# Altium PCB JacdacRgbLedGeneric 60.PcbDoc
Units mm, origin at the board's own origin, x right, y up, seen from the top; angles counter-clockwise.
Board outline 19 x 30.35 mm, 2 copper layers (Top Layer, Bottom Layer), stack 1.525 mm thick; 30 components, 16 nets, 97 pads, 13 vias.
Unrouted connection lines stored in the file: 10.
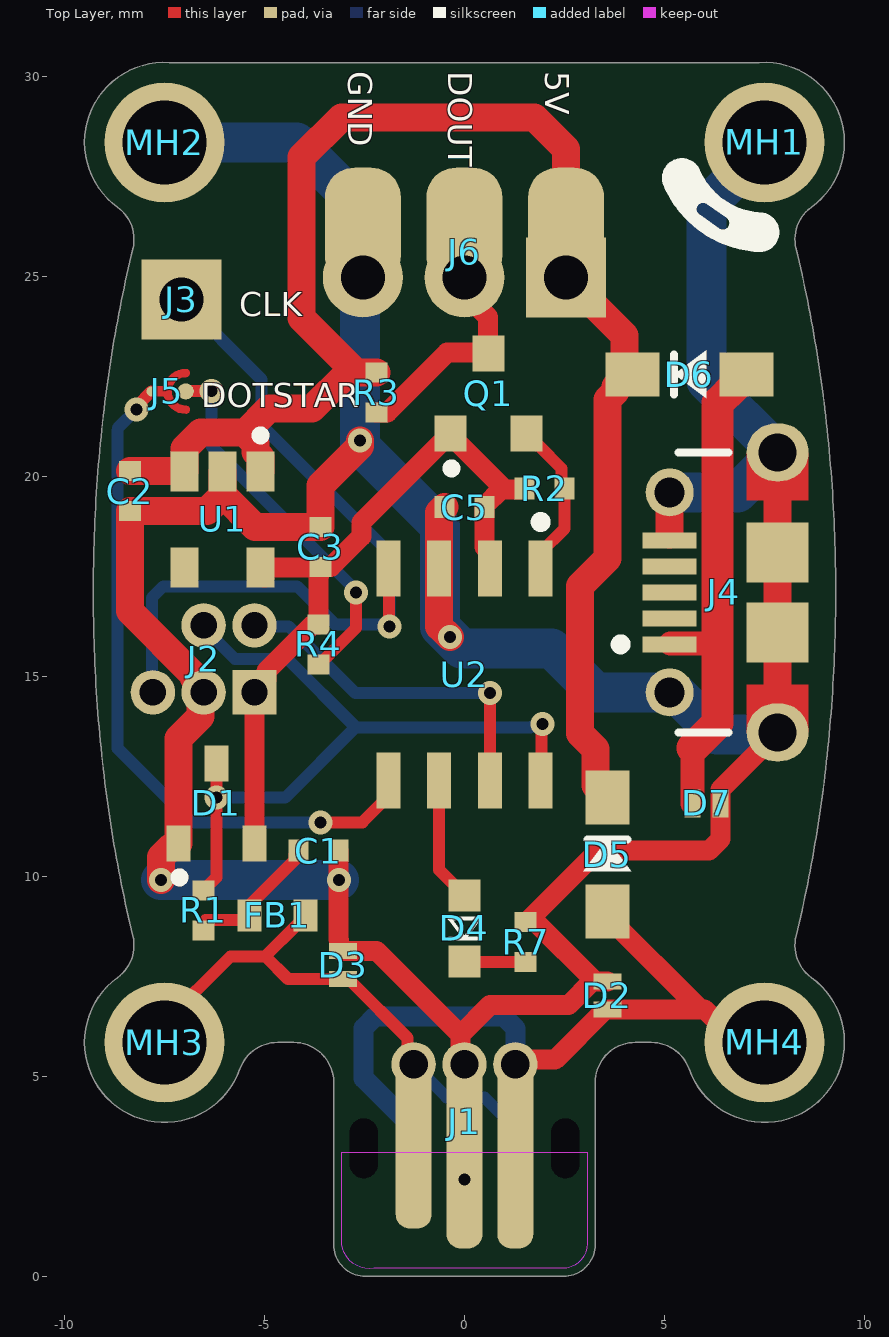
[diagram p0: Top Layer view]
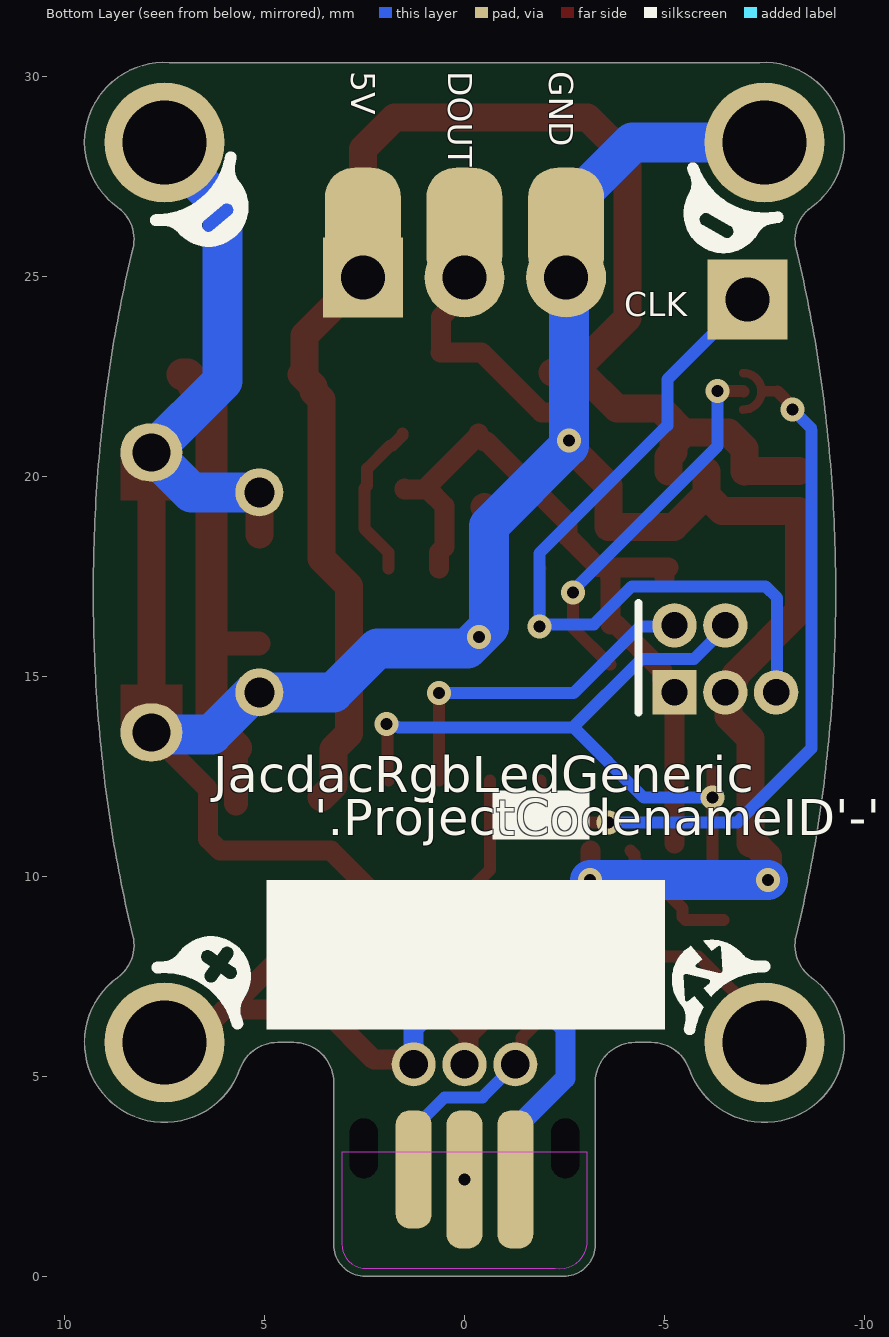
[diagram p1: Bottom Layer view, seen from below]

## Layer stack, top to bottom
Top Solder: solder mask 0.0102, Solder Resist, Dk 3.5
Top Layer: signal copper 0.0356
Dielectric 1: core 1.454, FR-4, Dk 4.2
Bottom Layer: signal copper 0.0356
Bottom Solder: solder mask 0.0102, Solder Resist, Dk 3.5

## Board outline
-9.493,6.017 -9.493,6.018 cw(c-7.5,5.85) -8.675,7.469 ccw(c-9.262,8.278) -8.291,8.516 -8.329,8.675 -8.367,8.835 -8.404,8.996 -8.44,9.158 -8.476,9.32 -8.511,9.483 -8.545,9.646 -8.578,9.811 -8.611,9.976 -8.643,10.141 -8.674,10.307 -8.704,10.474 -8.734,10.641 -8.763,10.809 -8.791,10.978 -8.818,11.147 -8.845,11.316 -8.871,11.486 -8.896,11.656 -8.92,11.827 -8.944,11.999 -8.966,12.17 -8.988,12.343 -9.009,12.515 -9.03,12.688 -9.049,12.862 -9.068,13.036 -9.086,13.21 -9.103,13.384 -9.12,13.559 -9.136,13.734 -9.15,13.91 -9.164,14.085 -9.178,14.261 -9.19,14.438 -9.202,14.614 -9.213,14.791 -9.223,14.968 -9.232,15.145 -9.24,15.322 -9.248,15.499 -9.255,15.677 -9.261,15.854 -9.266,16.032 -9.271,16.21 -9.274,16.388 -9.277,16.566 -9.279,16.744 -9.28,16.922 -9.281,17.1 -9.28,17.278 -9.279,17.456 -9.277,17.634 -9.274,17.812 -9.271,17.99 -9.266,18.168 -9.261,18.346 -9.255,18.523 -9.248,18.701 -9.24,18.878 -9.232,19.055 -9.223,19.232 -9.213,19.409 -9.202,19.586 -9.19,19.762 -9.178,19.938 -9.164,20.114 -9.15,20.29 -9.136,20.466 -9.12,20.641 -9.103,20.816 -9.086,20.99 -9.068,21.164 -9.049,21.338 -9.03,21.511 -9.009,21.685 -8.988,21.857 -8.966,22.029 -8.944,22.201 -8.92,22.373 -8.896,22.544 -8.871,22.714 -8.845,22.884 -8.818,23.053 -8.791,23.222 -8.763,23.391 -8.734,23.559 -8.704,23.726 -8.674,23.893 -8.643,24.059 -8.611,24.224 -8.578,24.389 -8.545,24.553 -8.511,24.717 -8.476,24.88 -8.44,25.042 -8.404,25.204 -8.367,25.365 -8.329,25.525 -8.291,25.684 ccw(c-9.262,25.922) -8.675,26.731 cw(c-7.5,28.35) -7.375,30.346 -7.373,30.346 7.375,30.346 cw(c7.5,28.35) 8.675,26.731 ccw(c9.262,25.922) 8.291,25.684 8.329,25.525 8.367,25.365 8.404,25.204 8.44,25.042 8.476,24.88 8.511,24.717 8.545,24.553 8.578,24.389 8.611,24.224 8.643,24.059 8.674,23.893 8.704,23.726 8.734,23.559 8.763,23.391 8.791,23.222 8.818,23.053 8.845,22.884 8.871,22.714 8.896,22.544 8.92,22.373 8.944,22.201 8.966,22.029 8.988,21.857 9.009,21.685 9.03,21.511 9.049,21.338 9.068,21.164 9.086,20.99 9.103,20.816 9.12,20.641 9.136,20.466 9.15,20.29 9.164,20.114 9.178,19.938 9.19,19.762 9.202,19.586 9.213,19.409 9.223,19.232 9.232,19.055 9.24,18.878 9.248,18.701 9.255,18.523 9.261,18.346 9.266,18.168 9.271,17.99 9.274,17.812 9.277,17.634 9.279,17.456 9.28,17.278 9.281,17.1 9.28,16.922 9.279,16.744 9.277,16.566 9.274,16.388 9.271,16.21 9.266,16.032 9.261,15.854 9.255,15.677 9.248,15.499 9.24,15.322 9.232,15.145 9.223,14.968 9.213,14.791 9.202,14.614 9.19,14.438 9.178,14.261 9.164,14.085 9.15,13.91 9.136,13.734 9.12,13.559 9.103,13.384 9.086,13.21 9.068,13.036 9.049,12.862 9.03,12.688 9.009,12.515 8.988,12.343 8.966,12.17 8.944,11.999 8.92,11.827 8.896,11.656 8.871,11.486 8.845,11.316 8.818,11.147 8.791,10.978 8.763,10.809 8.734,10.641 8.704,10.474 8.674,10.307 8.643,10.141 8.611,9.976 8.578,9.811 8.545,9.646 8.511,9.483 8.476,9.32 8.44,9.158 8.404,8.996 8.367,8.835 8.329,8.675 8.291,8.516 ccw(c9.262,8.278) 8.675,7.469 cw(c7.5,5.85) 9.491,6.036 cw(c7.5,5.85) 5.614,5.183 ccw(c4.672,4.85) 4.672,5.85 4.27,5.85 ccw(c4.27,4.85) 3.27,4.85 3.27,0.799 cw(c2.471,0.799) 2.471,0 2.47,0 -2.47,0 -2.471,0 cw(c-2.471,0.799) -3.27,0.799 -3.27,4.85 ccw(c-4.27,4.85) -4.27,5.85 -4.672,5.85 ccw(c-4.672,4.85) -5.614,5.183 cw(c-7.5,5.85)

## Design rules (kind name [scope] priority, off if disabled: settings)
AssemblyTestPointUsage [All] p1: valid=2
BoardOutlineClearance BoardOutlineSwitchClearance [InComponent('SW1')] p1: gap=0.3 ignorepadtopadclearanceinfootprint=FALSE except(0: Arc-SplitContinuation Track-SplitContinuation SMDPad-SplitContinuation THPad-OutlineEdge THPad-SplitContinuation Via-SplitContinuation Fill-SplitContinuation Poly-SplitContinuation Region-SplitContinuation Text-SplitContinuation; 0.2: Text-OutlineEdge)
BoardOutlineClearance [All] p2: gap=0.3 ignorepadtopadclearanceinfootprint=FALSE except(0: Arc-SplitContinuation Track-CutoutEdge Track-SplitContinuation SMDPad-SplitContinuation THPad-SplitContinuation Via-SplitContinuation Fill-SplitContinuation Poly-SplitContinuation Region-OutlineEdge Region-SplitContinuation Text-OutlineEdge Text-SplitContinuation; 0.2: SMDPad-CutoutEdge; 0.25: Arc-OutlineEdge Arc-CutoutEdge Track-OutlineEdge SMDPad-OutlineEdge THPad-OutlineEdge Poly-OutlineEdge Region-CutoutEdge)
Clearance [All] p1: gap=0.125 ignorepadtopadclearanceinfootprint=FALSE except(0: Arc-Hole Track-Hole SMDPad-Hole THPad-Hole Via-Hole Fill-Hole Poly-Hole Region-Hole Text-Hole)
ComponentClearance MH5.0KeepoutaAreaClearance [InComponent('MH1') or InComponent('MH2')  or InComponent('MH3') or InComponent('MH4') vs InComponent('D6') or InComponent('D7') or InComponent('D8') or InComponent('D9') or InComponent('D10') or InComponent('D11') or InComponent('D12') or InComponent('D13') or InComponent('C6') or InComponent('C7') or InComponent('C8')  or  InComponent('C9') or  InComponent('C12') or InComponent('J3')] p1: gap=0 collisioncheckmode=3 verticalgap=0 showdistances=FALSE
ComponentClearance [All] p2: gap=0.2 collisioncheckmode=3 verticalgap=0.2 showdistances=FALSE
DiffPairsRouting [All] p1: maxlimit=2 minlimit=0.15 mostfreqgap=0.15 toplayer_minwidth=0.15 toplayer_maxwidth=2 toplayer_prefwidth=0.15 bottomlayer_minwidth=0.15 bottomlayer_maxwidth=2 bottomlayer_prefwidth=0.15 substack1={CB9D278B-8BF5-444A-AAF4-837A2A9DF42D} toplayer_{cb9d278b-8bf5-444a-aaf4-837a2a9df42d}_minwidth=0.381 toplayer_{cb9d278b-8bf5-444a-aaf4-837a2a9df42d}_maxwidth=0.381 toplayer_{cb9d278b-8bf5-444a-aaf4-837a2a9df42d}_prefwidth=0.381 bottomlayer_{cb9d278b-8bf5-444a-aaf4-837a2a9df42d}_minwidth=0.381 bottomlayer_{cb9d278b-8bf5-444a-aaf4-837a2a9df42d}_maxwidth=0.381 bottomlayer_{cb9d278b-8bf5-444a-aaf4-837a2a9df42d}_prefwidth=0.381 substack2={826B8647-A721-4255-895A-19F9591B9CD1} toplayer_{826b8647-a721-4255-895a-19f9591b9cd1}_minwidth=0.381 toplayer_{826b8647-a721-4255-895a-19f9591b9cd1}_maxwidth=0.381 toplayer_{826b8647-a721-4255-895a-19f9591b9cd1}_prefwidth=0.381 bottomlayer_{826b8647-a721-4255-895a-19f9591b9cd1}_minwidth=0.381 bottomlayer_{826b8647-a721-4255-895a-19f9591b9cd1}_maxwidth=0.381 bottomlayer_{826b8647-a721-4255-895a-19f9591b9cd1}_prefwidth=0.381 substack3={E64FCAF4-1BC8-437D-B1E0-0E5F2DC0F59E} toplayer_{e64fcaf4-1bc8-437d-b1e0-0e5f2dc0f59e}_minwidth=0.381 toplayer_{e64fcaf4-1bc8-437d-b1e0-0e5f2dc0f59e}_maxwidth=0.381 toplayer_{e64fcaf4-1bc8-437d-b1e0-0e5f2dc0f59e}_prefwidth=0.381 bottomlayer_{e64fcaf4-1bc8-437d-b1e0-0e5f2dc0f59e}_minwidth=0.381 bottomlayer_{e64fcaf4-1bc8-437d-b1e0-0e5f2dc0f59e}_maxwidth=0.381 bottomlayer_{e64fcaf4-1bc8-437d-b1e0-0e5f2dc0f59e}_prefwidth=0.381 substack4={E61CE66C-507C-4E1E-8E83-C905434AFC1C} toplayer_{e61ce66c-507c-4e1e-8e83-c905434afc1c}_minwidth=0.381 toplayer_{e61ce66c-507c-4e1e-8e83-c905434afc1c}_maxwidth=0.381 toplayer_{e61ce66c-507c-4e1e-8e83-c905434afc1c}_prefwidth=0.381 bottomlayer_{e61ce66c-507c-4e1e-8e83-c905434afc1c}_minwidth=0.381 bottomlayer_{e61ce66c-507c-4e1e-8e83-c905434afc1c}_maxwidth=0.381 bottomlayer_{e61ce66c-507c-4e1e-8e83-c905434afc1c}_prefwidth=0.381 maxuncoupledlength=25
FabricationTestPointUsage [All] p1: valid=2 allowmultiple=FALSE
HoleSize [All] p1: absolutevalues=TRUE maxlimit=2.54 minlimit=0.2 maxpercent=80.000 minpercent=20.000
MinimumSolderMaskSliver [All] p1: minsoldermaskwidth=0.005
PlaneClearance [All] p1: clearance=0.3
PlaneConnect [All] p1: planeconnectstyle=Relief reliefexpansion=0.5 reliefentries=4 reliefconductorwidth=0.2 reliefairgap=0.3
PolygonConnect "PolygonConnect GND" [isVIA] p1: connectstyle=Relief reliefconductorwidth=0.2 reliefentries=4 polygonreliefangle="90 Angle" airgapwidth=0.2
PolygonConnect [All] p2: connectstyle=Relief reliefconductorwidth=0.2 reliefentries=4 polygonreliefangle="90 Angle" airgapwidth=0.2
RoutingVias [All] p1: holewidth=0.3 width=0.6 viastyle="Through Hole" minholewidth=0.3 minwidth=0.6 maxholewidth=0.3 maxwidth=0.8
SilkToSilkClearance [All] p1: silktosilkclearance=0.001
SilkToSolderMaskClearance [IsPad] p1: minsilkscreentomaskgap=0.05 clearancetoexposedcopper=TRUE
SolderMaskExpansion [All] p1: expansion=0.075 istentingtop=FALSE
Width [All] p1: maxlimit=2 minlimit=0.15 preferedwidth=0.15 substack1={CB9D278B-8BF5-444A-AAF4-837A2A9DF42D} substack2={826B8647-A721-4255-895A-19F9591B9CD1} substack3={E64FCAF4-1BC8-437D-B1E0-0E5F2DC0F59E} substack4={E61CE66C-507C-4E1E-8E83-C905434AFC1C} minimp=50.000000 maximp=50.000000 favimp=50.000000
20 further rules are at their usual default settings.

## Components (designator, comment, footprint, x,y, rotation, side; value= is the part's Value field where it differs from the comment)
C1 "CL05C330JB51PNC" "C0402_0.55MM - WITHOUT OUTLINE" -3.65,10.641 r180 top
C2 "CL05A105KP5NNNC" "C0402_0.55MM - WITHOUT OUTLINE" -8.368,19.634 r90 top
C3 "CL05A105KP5NNNC" "C0402_0.55MM - WITHOUT OUTLINE" -3.6,18.235 r270 top
C5 "CL05A105KP5NNNC" "C0402_0.55MM - WITHOUT OUTLINE" 0,19.232 r0 top
D1 "BAT54S" "NXP-BAT54S-TO-236AB - WITHOUT OUTLINE" -6.2,11.825 r90 top
D2 "RCLAMP0521P-N" "TVS 0402 - L" 3.575,7.025 r90 top
D3 "RCLAMP0521P-N" "TVS 0402 - L" -3.031,7.785 r90 top
D4 "SML-D12D" "Rohm SML-D12 Orange - without outline" 0,8.7 r90 top
D5 "MBR120VLSFT3G" MBR120VLSFT3G 3.575,10.541 r270 top
D6 "MBR120VLSFT3G" MBR120VLSFT3G 5.625,22.55 r0 top
D7 "RCLAMP0521P-N" "TVS 0402 - L" 6.057,11.827 r0 top
FB1 "TDK MPZ1608S102ATA00" "TDK MPZ1608 0.8mm - without outline" -4.675,9.025 r180 top
J1 "3 pin JACDAC edge connector" JACDAC_EDGE_CONNECTOR_NO_TRACES 0,5.85 r180 top
J2 "Hack Connect Mini 1.27 mm pitch 2-row" HACK_CONNECT_MINI_5_X_1_27 -5.25,14.6 r90 top
J3 "0.1\"" "Generic 1x1 2.54mm header -with SMD pads" -7.075,24.425 r0 top
J4 "Amphenol FCI 10118194-0001LF" "FCI-10118194-0001LF-5_V no slots" 6.48,17.1 r90 top
J5 "OpenSolderBlob" SolderBlobA -7.35,22.125 r0 top
J6 "0.1\"" "GENERIC 1X3 2.54MM HEADER -WITH SMD PADS" 0,24.975 r0 top
MH1 "MH_5.0MMK_3.0MMC_2.1MMD_PTH" MH_5.0MMK_3.0MMC_2.1MMD_PTH 7.5,28.35 r0 top
MH2 "MH_5.0MMK_3.0MMC_2.1MMD_PTH" MH_5.0MMK_3.0MMC_2.1MMD_PTH -7.5,28.35 r135 top
MH3 "MH_5.0MMK_3.0MMC_2.1MMD_PTH" MH_5.0MMK_3.0MMC_2.1MMD_PTH -7.5,5.85 r180 top
MH4 "MH_5.0MMK_3.0MMC_2.1MMD_PTH" MH_5.0MMK_3.0MMC_2.1MMD_PTH 7.5,5.85 r270 top
Q1 "2N7002K" SOT-23 0.6,22.075 r90 top
R1 "RC0402FR-07220RL" "R0402 - Without outline" -6.525,9.15 r270 top
R2 "10k" "R0402 - Without outline" 2,19.7 r0 top
R3 "10k" "R0402 - Without outline" -2.2,22.1 r270 top
R4 "10k" "R0402 - Without outline" -3.65,15.8 r270 top
R7 "RC0402FR-071KL" "R0402 - Without outline" 1.526,8.357 r270 top
U1 "LDO 3.3V/300 mA" "ON_SEMI-SOT23-5 - WITHOUT OUTLINE" -6.05,18.925 r270 top
U2 "STM32G031J6M6" 8-SOIC 0,15.05 r270 top

## Footprints (in the part's own frame and the unit in brackets; to place one, negate y for a bottom-side part, rotate by r counter-clockwise, add the part's x,y. Pads: shape width x height; smd on the part's side, far side on the other; paste and mask are expansions set on the pad)
8-SOIC [mm] "8-SOIC (0.154\", 3.90mm Width)"
  rect 1.4x0.6 smd: 1(-2.65,1.905) 2(-2.65,0.635) 3(-2.65,-0.635) 4(-2.65,-1.905) 5(2.65,-1.905) 6(2.65,-0.635) 7(2.65,0.635) 8(2.65,1.905)
  silkscreen extent -3.91,1.81 -3.71,2, body extent -2.96,-2.51 2.96,2.51, height 1.75
"C0402_0.55MM - WITHOUT OUTLINE" [mm]
  rect 0.5x0.55 smd: 1(-0.5,0) 2(0.5,0)
  body extent -0.5,-0.25 0.5,0.25, height 0.55
"FCI-10118194-0001LF-5_V no slots" [mm] "SMD, 5-Leads, Body 7x5mm, Pitch 0.65 mm"
  rect 0.4x1.35 smd: 1(-1.3,1.35) 2(-0.65,1.35) 3(0,1.35) 4(0.65,1.35) 5(1.3,1.35)
  round 1.2 hole 0.75: 6(-2.5,1.35) 7(2.5,1.35)
  oval 1.45x1.55 hole 0.95: 8(-3.5,-1.35) 9(3.5,-1.35)
  rect 1.5x1.55 smd: 10(-1,-1.35) 11(1,-1.35)
  Top Layer region: -2.3,-2.125 -2.3,-0.575 -3.5,-0.575 -3.5,-2.125
  Top Layer region: 3.5,-2.125 3.5,-0.575 2.3,-0.575 2.3,-2.125
  silkscreen extent -3.5,-0.13 3.5,2.7, body extent -4.02,-4.03 4.02,1.55, height 2.72
"Generic 1x1 2.54mm header -with SMD pads" [mm] "1x1 2.54mm 0.1\""
  rect 2x2 hole 1.1: 1(0,0)
"GENERIC 1X3 2.54MM HEADER -WITH SMD PADS" [mm] "1x3 2.54mm 0.1\""
  rect 2x2 hole 1.1: 1(2.54,0)
  rrect78% 1.9x2.95 smd paste-1 mask+0: 1(2.54,1.27) 2(0,1.27) 3(-2.54,1.27)
  rrect78% 1.9x2.95 smd far side paste-1 mask+0: 1(2.54,1.27) 2(0,1.27) 3(-2.54,1.27)
  round 2 hole 1.1: 2(0,0) 3(-2.54,0)
HACK_CONNECT_MINI_5_X_1_27 [mm]
  rect 1.11x1.11 hole 0.66: 1(0,0)
  round 1.11 hole 0.66: 2(1.676,0) 3(0,1.27) 4(1.676,1.27) 5(0,2.54)
JACDAC_EDGE_CONNECTOR_NO_TRACES [mm] "JacDac 3 pin connector with no traces"
  rrect78% 0.9x2.95 smd far side paste-1 mask+0: 1(-1.27,3.175)
  rrect78% 0.9x4.3 smd paste-1 mask+0: 1(1.27,2.5)
  round 1.11 / inner round 0.71 / far side round 1.1 hole 0.71 paste-0.254 mask+0: 1(1.27,0.55) 2(0,0.55) 3(-1.27,0.55)
  rrect78% 0.9x3.45 smd far side paste-1 mask+0: 2(0,3.425) 3(1.27,3.425)
  rrect78% 0.9x4.8 smd paste-1 mask+0: 2(0,2.75) 3(-1.27,2.75)
  round 0 hole 0.7 slot 1.5 at 90 deg unplated: ""(-2.52,2.65) ""(2.52,2.65)
  Top Layer keep-out region: -3.075,2.75 -3.07,5.033 -2.987,5.341 -2.761,5.567 -2.453,5.65 -2.453,5.65 2.27,5.65 2.545,5.635 2.794,5.516 2.978,5.31 3.07,5.05 3.07,5.05 3.07,2.75
  Bottom Layer keep-out region: -3.07,2.75 -3.07,5.033 -3.023,5.269 -2.889,5.469 -2.689,5.603 -2.453,5.65 -2.453,5.65 2.27,5.65 2.545,5.635 2.794,5.516 2.978,5.31 3.07,5.05 3.07,5.05 3.07,2.75
MBR120VLSFT3G [mm] "SODFL, 2-Leads, Body 1.65x3.60mm, IPC Medium Density"
  rect 1.35x1.1 smd: 1(-1.425,0) 2(1.425,0)
  silkscreen extent -0.38,-0.6 0.42,0.6, body extent -1.73,-0.82 1.72,0.82, height 0.95
MH_5.0MMK_3.0MMC_2.1MMD_PTH [mm] "Mounting Hole 5.0mm clearance, 3.1 annualar ring and 2.1mm PTH"
  round 3 hole 2.1 mask+0.05: 1(0,0)
"NXP-BAT54S-TO-236AB - WITHOUT OUTLINE" [mm] "SOT23, 3-Leads, Body 2.90x2.30mm, Pitch 0.95mm, IPC Medium Density"
  rect 0.9x0.6 smd: 1(-1,0.95) 2(-1,-0.95) 3(1,0)
  silkscreen extent -1.95,0.82 -1.75,1.02, body extent -1.32,-1.5 1.32,1.5, height 1.12
"ON_SEMI-SOT23-5 - WITHOUT OUTLINE" [mm]
  rect 1x0.7 smd: 1(-1.2,0.95) 2(-1.2,0) 3(-1.2,-0.95) 4(1.2,-0.95) 5(1.2,0.95)
  silkscreen extent -2.2,0.85 -2,1.05, body extent -1.5,-1.57 1.5,1.58, height 1.1
"R0402 - Without outline" [mm]
  rect 0.5x0.55 smd: 1(-0.5,0) 2(0.5,0)
  body extent -0.5,-0.25 0.5,0.25, height 0.35
"Rohm SML-D12 Orange - without outline" [mm]
  rect 0.8x0.8 smd paste-0.05: 1(-0.825,0) 2(0.825,0)
  silkscreen extent -0.25,-0.38 0.25,0.38, body extent -0.8,-0.4 0.8,0.4, height 0.54
SolderBlobA [mil] "open solder blob, 'ball and socket' style"
  round 16 smd paste-10: 1(15,0)
  round 1 smd paste-10 mask-1: 2(-22.02,0) 2(-18.47,-3.55) 2(-18.47,3.55)
  oval 10x10.01 smd paste-10 mask-2: 2(-18.65,0.03)
  Top Layer region: -17,-3.84 -18.47,-3.55 -19.72,-2.72 -20.55,-1.47 -20.84,0 -20.84,0 -20.55,1.47 -19.72,2.72 -18.47,3.55 -17,3.84 -17,3.84 -15.53,3.55 -14.28,2.72 -13.45,1.47 -13.16,0 -13.16,0 -13.45,-1.47 -14.28,-2.72 -15.53,-3.55 -17,-3.84
  Top Layer region: -17,-5.01 -19.18,-4.52 -20.92,-3.13 -21.89,-1.12 -21.89,1.12 -20.92,3.13 -19.18,4.52 -17,5.01 -17,5.02 -6.44,5.02 -2.16,13.79 5.48,19.85 15,22.01 15,22.02 16.54,21.71 17.84,20.84 18.71,19.54 19.02,18 19.01,18 18.71,16.46 17.84,15.16 16.54,14.29 15,13.99 15,13.99 9.65,12.92 5.11,9.89 2.08,5.35 1.02,0 1.01,0 2.08,-5.35 5.11,-9.89 9.65,-12.92 15,-13.99 15,-13.98 16.54,-14.29 17.84,-15.16 18.71,-16.46 19.02,-18 19.01,-18 18.71,-19.54 17.84,-20.84 16.54,-21.71 15,-22.01 15,-22.01 5.48,-19.85 -2.16,-13.79 -6.44,-5.02 -6.44,-5.01
SOT-23 [mm] "SOT23, 3-Leads, Body 2.90x2.45mm, Pitch 0.95mm, IPC Medium Density"
  rect 0.9x0.8 smd: 1(-1,0.95) 2(-1,-0.95) 3(1,0)
  silkscreen extent -1.97,0.82 -1.78,1.02, body extent -1.27,-1.5 1.23,1.5, height 1.1
"TDK MPZ1608 0.8mm - without outline" [mm]
  rect 0.6x0.8 smd paste-0.1: 1(-0.7,0) 2(0.7,0)
  body extent -0.8,-0.4 0.8,0.4, height 0.8
"TVS 0402 - L" [mm] "TVS 0402 RoHS"
  rect 0.4x0.7 smd paste-0.038 mask+0.05: 1(-0.35,0) 2(0.35,0)
  body extent -0.5,-0.3 0.5,0.3, height 0.5

## Part data
C1: "CAP CER 33PF 50V NP0 0402", Capacitance=33pF, Case Code (Imperial)=0402, Case Code (Metric)=1005, Manufacturer=Samsung, Max Operating Temperature=125°C, Min Operating Temperature=-55°C, Ratings=AEC-Q200, Supplier Part Number 1=1276-6515-1-ND, Tolerance=5%, Voltage Rating=50V, Case/Package=0402, Category=Capacitors, Checked=?, ComponentLink1Description="Samsung datasheet online", ComponentLink1URL=http://www.samsungsem.com/kr/support/library/product-catalog/mlcc.jsp, Created=DG, Lead Free="Lead Free", Length=0.039inch, Manufacturer Part Number=CL05C330JB51PNC, Mount="Surface Mount", Packaging="Tape and Reel", Pricing 1="1=0.10000, 10=0.07500, 50=0.04060, 100=0.03320, 500=0.02374, 1000=0.01865, 2500=0.01696, 5000=0.01560 (USD)", Pricing 2="1=0.11000, 10=0.08200, 100=0.03600, 500=0.02600, 1000=0.02000, 2500=0.01800 (USD)", Pricing 3="10000=0.00780 (USD)", RoHS=Yes, Stock 1=250654, Stock 2=97900, Stock 3=100000, Supplier 1=Digi-Key, Supplier 2=Mouser, Supplier 3="Future Electronics", Supplier Part Number 2=187-CL05C330JB51PNC, Supplier Part Number 3=6022520, Thickness=0.022inch, Width=0.02inch
C2 C3 C5: "CAP CER 1UF 10V X5R 0402", Capacitance=1µF, Case Code (Imperial)=0402, Case Code (Metric)=1005, Dielectric=X5R, Manufacturer=Samsung, Max Operating Temperature=85°C, Min Operating Temperature=-55°C, Package Quantity=1, Supplier Part Number 1=1276-1076-1-ND, Tolerance=10%, Voltage Rating=10V, Case/Package=0402, Category=Capacitors, Checked=?, ComponentLink1Description="Online datasheet", ComponentLink1URL=https://datasheet.ciiva.com/15195/getdatasheetpartid-358390-15195630.pdf, Contact Plating=Tin, Created=DG, Depth=0.5mm, Height=0.5mm, Length=1mm, Manufacturer Part Number=CL05A105KP5NNNC, Material=Ceramic, Mount="Surface Mount", Packaging="Tape and Reel", Pricing 1="1=0.10000, 10=0.03900, 50=0.02100, 100=0.01720, 500=0.01228, 1000=0.00965, 2500=0.00877, 5000=0.00807 (USD)", Pricing 2="1=0.10000, 10=0.04200, 100=0.01800, 500=0.01300, 1000=0.01000, 2500=0.00900 (USD)", Pricing 3="10=0.02450, 100=0.02000, 500=0.01310, 2500=0.00920, 5000=0.00810, 10000=0.00640, 50000=0.00490 (GBP)", Radiation Hardening=No, RoHS=Yes, Stock 1=5705569, Stock 2=928941, Stock 3=53670, Supplier 1=Digi-Key, Supplier 2=Mouser, Supplier 3=Farnell, Supplier Part Number 2=187-CL05A105KP5NNNC, Supplier Part Number 3=3013329, Thickness=0.022inch, Width=0.02inch
D1: "DIODE ARRAY SCHOTTKY 30V SOT23", Manufacturer=Nexperia, Manufacturer Part Number=BAT54S,235, Supplier Part Number 1=1727-1868-1-ND, Category="Rectifier Diodes", ComponentLink1Description="NXP datasheet online", ComponentLink1URL=https://assets.nexperia.com/documents/data-sheet/BAT54_SER.pdf, Pricing 1="1=0.13000, 10=0.11900, 100=0.05610, 500=0.03326, 1000=0.02185, 5000=0.02138 (USD)", RoHS=No, Stock 1=14011, Supplier 1=Digi-Key, Supplier 2=Mouser, Supplier 3=RSComponents, Supplier Part Number 2=771-BAT54S235, Supplier Part Number 3=1707990
D2 D3 D7: "Bidirectional 5V (Max) 6V 16V 3.5A (8/20us) 0402 TVS RoHS", Manufacturer="Born Semiconductor", Package=0402, Supplier1 Part Number=C316043, Checked By=?, ComponentLink1Description="Online datasheet", ComponentLink1URL=https://datasheet.lcsc.com/szlcsc/Bourne-Semicon-Shenzhen-RCLAMP0521P-N_C316043.pdf, Created By="D Gakure", Manufacturer Part Number=RCLAMP0521P-N, Supplier1=LCSC
D4: "1.6 x 0.8 x 0.55mm (0603) LED 605nm Orange", Colour=Orange, Current - Test=20mA, Luminous Flux @ Current - Test=-, Manufacturer="Rohm Semiconductor", Manufacturer Part Number=SML-D12D8WT86, Millicandela Rating=100mcd, Package / Case="0603 (1608 Metric)", Supplier Part Number 1=511-1577-1-ND, Voltage - Forward (Vf) (Typ)=2.2V, Category=Optoelectronics, ComponentLink1Description="Online datasheet", ComponentLink1URL=https://d1d2qsbl8m0m72.cloudfront.net/en/products/databook/datasheet/opto/led/chip_mono/sml-d12x8_d13x8-e.pdf, Height=0.55mm, Lens Style/Size="Rectangle with Flat Top, 1.2mm x 0.8mm", Lens Type="Diffused, White", Mounting Type="Surface Mount", Packaging="Cut Tape (CT)", Pricing 1="1=0.38, 10=0.279, 25=0.2232, 100=0.1478, 250=0.1046, 500=0.08926, 1000=0.06974 (GBP)", RoHS="RoHS Compliant", Size / Dimension="1.60mm L x 0.80mm W", Stock 1=1719, Supplier 1=Digi-Key, Viewing Angle=-, Wavelength - Dominant=605nm, Wavelength - Peak=-
D5 D6: "DIODE SCHOTTKY 20V 1A SOD123FL", Average Rectified Current=1A, Forward Voltage=340mV, Manufacturer="ON Semiconductor", Max Forward Surge Current (Ifsm)=45A, Max Operating Temperature=125°C, Max Repetitive Reverse Voltage (Vrrm)=20V, Max Reverse Leakage Current=600uA, Min Operating Temperature=-65°C, Package Quantity=10000, Supplier Part Number 1=MBR120VLSFT3GOSCT-ND, Category="Schottky Diodes", ComponentLink4Description="On Semi datasheet online", ComponentLink4URL=https://datasheet.ciiva.com/6380/mbr120vlsft1-d-6380910.pdf, Current Rating=1A, Element Configuration=Single, Forward Current=1A, Halogen Free="Halogen Free", Lead Free="Lead Free", Manufacturer Part Number=MBR120VLSFT3G, Max Reverse Voltage (DC)=20V, Max Surge Current=45A, Number of Pins=2, Output Current=1A, Packaging="Tape and Reel", Peak Non-Repetitive Surge Current=45A, Peak Reverse Current=600uA, Polarity=Standard, Pricing 1="1=0.39000, 10=0.28600, 100=0.19920, 500=0.12616, 1000=0.10292, 2000=0.09960, 5000=0.09628 (USD)", Radiation Hardening=No, REACH SVHC="No SVHC", RoHS=Yes, Stock 1=32481, Supplier 1=Digi-Key, Supplier 2=Mouser, Supplier 3=RSComponents, Supplier Part Number 2=863-MBR120VLSFT3G, Supplier Part Number 3=1867479, Voltage Rating (DC)=20V
FB1: "0603 1k@100MHz 0.8A chip", Case Code (Imperial)=0603, Case Code (Metric)=1608, Current Rating=800mA, DC Resistance (DCR)=300mR, Manufacturer=TDK, Manufacturer Part Number=MPZ1608S102ATA00, Package Quantity=4000, Supplier Part Number 1=445-8694-1-ND, Tolerance=25%, Case/Package=0603, ComponentLink2Description="datasheet online", ComponentLink2URL=https://www.mouser.co.uk/datasheet/2/400/eads_commercial_power_mpz1608_en-923650.pdf, ComponentLink3Description=datasheet, ComponentLink3URL="Y:\System\Altium\Libraries 2014\TDK\Datasheets\eads_commercial_power_mpz1608_en-923650.pdf", Core Material=Ferrite, Height=0.037inch, Impedance="1kR @ 100MHz", Length=0.063inch, Max DC Current=800mA, Mount="Surface Mount", Packaging="Tape and Reel", Pricing 1="1=0.1, 10=0.079, 25=0.0716, 50=0.0644, 100=0.0472, 250=0.03432, 500=0.03146, 1000=0.02717 (USD)", Stock 1=113542, Supplier 1=Digi-Key, Supplier 2=Mouser, Supplier Part Number 2=810-MPZ1608S102ATA00, Width=0.031inch
J1: library part "JACDAC edge connector", "3 pin JACDAC edge connector 1.27mm pitch", Manufacturer Part Number=JACDAC_EDGE_CONNECTOR, Checked By=?, ComponentLink1Description="Yuliang JACDAC cable connector drawing online", ComponentLink1URL=https://github.com/microsoft/jacdac-mdk/blob/main/connector/JACDAC-Connector-by-Yuliang-2020-11-28.pdf, ComponentLink2Description="JACDAC PCB edge connector spec onlin", ComponentLink2URL=https://github.com/microsoft/jacdac-mdk/blob/main/connector/JACDAC_PCB_Edge_Connector_Drawing_JD-PEC-01_rev_01.pdf, Created By="D. Gakure", PCB Type="1.6mm FR4"
J2: library part HACK_CONNECT_MINI
J3: library part "Generic Header 2.54mm, 1x1 way.", "2.54mm, 1x1 way", ComponentLink1Description="header strip datasheet", ComponentLink1URL=http://www.farnell.com/datasheets/1518407.pdf, Contact Termination=Solder, Lead Spacing=2.54, No. of Contacts=4, No. of Rows=1, Pitch Spacing=2.54
J4: "CONN USB MICRO B RECPT SMT R/A", Color=Black, Current Rating="1.8A per Contact", Flammability Rating="UL94 V-0", Insulation Resistance=1GR, Manufacturer="Amphenol FCI", Manufacturer Part Number=10118194-0001LF, Max Operating Temperature=85°C, Max Voltage Rating (AC)=100V, Min Operating Temperature=-55°C, Operating Temperature="-30°C ~ 80°C", Package Quantity=9600, Supplier Part Number 1=649-10118194-0001LF, Voltage - Rated=100VAC, Category="Connectors, Interconnects", ComponentLink1Description="FCI drawing", ComponentLink1URL=http://portal.fciconnect.com/Comergent//fci/drawing/10118194.pdf, ComponentLink2Description="FCI datasheet", ComponentLink2URL=https://cdn.amphenol-icc.com/media/wysiwyg/files/documentation/datasheet/inputoutput/io_usb_micro.pdf, Connector Type="USB - micro B", Contact Finish=Gold, Contact Material="Copper Alloy", Contact Plating=Gold, Created By=HUGHWI, Depth=5mm, Features="Solder Retention", Gender=Receptacle, Housing Material=Polymer, Ingress Protection=-, Insulation Color=Black, Lead Free="Lead Free", Length=8.05mm, Material Flammability Rating="UL94 V-0", Mating Cycles=10000, Mount="Surface Mount,Horizontal", Mounting Feature=Horizontal, Mounting Type="Surface Mount, Right Angle; Through Hole", Number of Contacts=5, Number of Ports=1, Number of Terminals/Pins=5, Orientation="Right Angle", Packaging="Cut Tape (CT)", Part Status=Active, Pitch=0.65mm, Pricing 1="1=0.43000, 10=0.32000, 100=0.26800, 1200=0.21400, 2400=0.17500, 9600=0.17500 (USD)", Pricing 2="1=0.44910, 10=0.42910, 25=0.36770, 50=0.31260, 100=0.30030, 250=0.26960, 500=0.25740, 9600=0.19900, 96000=0.19390, 960000=0.16330, 4800000=0.14520, 9600000=0.14500 (USD)", Pricing 3="1=0.42000, 50=0.31500, 100=0.30000, 250=0.28000, 500=0.26500 (USD)", Radiation Hardening=No, RoHS="RoHS Compliant", Shell/Shielding Material="Steel, Stainless", Shielding=Shielded, Specifications="USB 2.0", Stock 1=7344, Stock 2=5099, Stock 3=725, Supplier 1=Mouser, Supplier 2="Arrow Electronics", Supplier 3="Future Electronics", Supplier Part Number 2=10118194-0001LF, Supplier Part Number 3=9100242, Termination=Solder
J5: "Open solder blob"
J6: library part "Generic Header 2.54mm, 3x1 way.", "2.54mm, 3x1 way", ComponentLink1Description="header strip datasheet", ComponentLink1URL=http://www.farnell.com/datasheets/1518407.pdf, Contact Termination=Solder, Lead Spacing=2.54, No. of Contacts=4, No. of Rows=1, Pitch Spacing=2.54
MH1 MH2 MH3 MH4: "Mounting Hole 5.0mm keepout, 3.0mm annualar ring and 2.1mm Drill PTH"
Q1: library part "2N7002K (2)", "MOSFET Transistor, N Channel, 300 mA, 60 V, 2 ohm, 10 V, 2.5 V", Case/Package=SOT-23, Continuous Drain Current (ID)=300mA, Drain to Source Breakdown Voltage=60V, Drain to Source Resistance=2R, Gate to Source Voltage (Vgs)=20V, Input Capacitance=50pF, Manufacturer="ON Semiconductor / Fairchild", Max Operating Temperature=150°C, Max Power Dissipation=350mW, Min Operating Temperature=-55°C, Package Quantity=1, Supplier Part Number 1=2N7002KCT-ND, Threshold Voltage=2.5V, Category=MOSFETs, Checked By=?, ComponentLink1Description="Online datasheet", ComponentLink1URL=https://www.onsemi.com/pdf/datasheet/2n7002k-d.pdf, Contact Plating=Tin,Matte, Created By="D. Gakure", Drain to Source Voltage (Vdss)=60V, Drain-source On Resistance-Max=2R, Element Configuration=Single, Height=1.2mm, Lead Free="Lead Free", Length=2.92mm, Manufacturer Part Number=2N7002K, Mount="Surface Mount", Number of Elements=1, Number of Pins=3, On-State Resistance=2R, Packaging="Tape and Reel", Polarity=N-CHANNEL, Power Dissipation=350mW, Pricing 1="1=0.40000, 10=0.32500, 25=0.27240, 100=0.17240, 500=0.11344, 1000=0.07714 (USD)", Pricing 2="1=0.40000, 10=0.27300, 50=0.27300, 100=0.13400, 1000=0.07800, 10000=0.05100 (USD)", Pricing 3="5=0.34800, 10=0.23500, 100=0.09100, 500=0.05850, 3000=0.04630, 9000=0.03860, 24000=0.03750, 45000=0.03530 (GBP)", Radiation Hardening=No, Rds On Max=2R, REACH SVHC="No SVHC", RoHS=Yes, Stock 1=53564, Stock 2=111825, Stock 3=101059, Supplier 1=Digi-Key, Supplier 2=Mouser, Supplier 3=Farnell, Supplier Part Number 2=512-2N7002K, Supplier Part Number 3=2453382, Turn-Off Delay Time=30ns, Turn-On Delay Time=5ns, Voltage=60V, Width=1.3mm
R1: "RES SMD 220 OHM 1% 1/16W 0402", Case Code (Imperial)=0402, Case Code (Metric)=1005, Manufacturer=Yageo, Max Operating Temperature=155°C, Max Power Dissipation=63mW, Min Operating Temperature=-55°C, Package Quantity=1, Power Rating=62.5mW, Resistance=220R, Resistor Type="Thick Film", Supplier Part Number 1=311-220LRCT-ND, Temperature Coefficient=100ppm/°C, Tolerance=1%, Voltage Rating=50V, Case/Package=0402, Category=Resistors, Checked=?, ComponentLink1Description="Online datasheet", ComponentLink1URL=https://datasheet.ciiva.com/11819/0900766b80c66297-11819466.pdf, Created=D.G, Depth=0.5mm, Features="Moisture Resistant", Height=0.016inch, Lead Free="Lead Free", Length=1mm, Manufacturer Part Number=RC0402FR-07220RL, Military Standard=Not, Number of Pins=2, Number of Terminations=2, Packaging="Tape and Reel", Pricing 1="1=0.10000, 10=0.01400, 100=0.00580, 1000=0.00262, 2500=0.00228, 5000=0.00188 (USD)", Pricing 2="1=0.10000, 10=0.01200, 100=0.00400, 1000=0.00400, 2500=0.00400, 10000=0.00300 (USD)", Pricing 3="1=0.08130, 25=0.01210, 100=0.01120, 250=0.01030, 500=0.00900 (GBP)", REACH SVHC="No SVHC", RoHS=Yes, Stock 1=1286042, Stock 2=324625, Stock 3=18234, Supplier 1=Digi-Key, Supplier 2=Mouser, Supplier 3=Farnell, Supplier Part Number 2=603-RC0402FR-07220RL, Supplier Part Number 3=2147864, Termination=SMD/SMT, Voltage Rating (DC)=50V, Width=0.02inch
R2 R3 R4: library part RC0402FR-0710KL, "RES SMD 10K OHM 1% 1/16W 0402", Case Code (Imperial)=0402, Case Code (Metric)=1005, Manufacturer=Yageo, Max Operating Temperature=155°C, Min Operating Temperature=-55°C, Power Rating=62.5mW, Resistance=10kR, Resistor Type="Thick Film", Supplier Part Number 1=311-10.0KLRCT-ND, Temperature Coefficient=100ppm/°C, Tolerance=1%, Voltage Rating=50V, Case/Package=0402, Category=Resistors, Checked=?, ComponentLink1Description=https://datasheet.ciiva.com/7660/38568-7660787.pdf?src-supplier=Element14, ComponentLink1URL=https://datasheet.ciiva.com/7660/38568-7660787.pdf?src-supplier=Element14, ComponentLink2Description=https://datasheet.ciiva.com/7849/1784430-7849813.pdf?src-supplier=Element14, ComponentLink2URL=https://datasheet.ciiva.com/7849/1784430-7849813.pdf?src-supplier=Element14, ComponentLink3Description=https://datasheet.ciiva.com/7849/1686128-7849814.pdf?src-supplier=Element14, ComponentLink3URL=https://datasheet.ciiva.com/7849/1686128-7849814.pdf?src-supplier=Element14, ComponentLink4Description=https://datasheet.ciiva.com/7849/1784430-7849815.pdf?src-supplier=Element14, ComponentLink4URL=https://datasheet.ciiva.com/7849/1784430-7849815.pdf?src-supplier=Element14, ComponentLink5Description=https://datasheet.ciiva.com/22747/1018594-22747512.pdf?src-supplier=Element14, ComponentLink5URL=https://datasheet.ciiva.com/22747/1018594-22747512.pdf?src-supplier=Element14, ComponentLink6Description=https://datasheet.ciiva.com/12667/pyu-rc0402-51-rohs-l-6-r-12667067.pdf?src-supplier=Mouser, ComponentLink6URL=https://datasheet.ciiva.com/12667/pyu-rc0402-51-rohs-l-6-r-12667067.pdf?src-supplier=Mouser, ComponentLink7Description=https://datasheet.ciiva.com/7983/1018594-7983486.pdf?src-supplier=Element14, ComponentLink7URL=https://datasheet.ciiva.com/7983/1018594-7983486.pdf?src-supplier=Element14, Created=DG, Depth=0.5mm, Height=0.32mm, Lead Free="Lead Free", Lead Pitch=0.2mm, Length=1mm, Manufacturer Part Number=RC0402FR-0710KL, Military Standard=Not, Number of Pins=2, Number of Terminations=2, Packaging="Tape and Reel", Pricing 1="1=0.10000, 10=0.01400, 100=0.00580, 1000=0.00262, 2500=0.00228, 5000=0.00188 (USD)", Pricing 2="1=0.10000, 10=0.01300, 100=0.00400, 1000=0.00300, 2500=0.00300, 10000=0.00200 (USD)", Pricing 3="10000=0.00350 (GBP)", REACH SVHC="No SVHC", RoHS=Yes, Stock 1=40173593, Stock 2=23672167, Stock 3=370000, Supplier 1=Digi-Key, Supplier 2=Mouser, Supplier 3=Farnell, Supplier Part Number 2=603-RC0402FR-0710KL, Supplier Part Number 3=2363463, Termination=SMD/SMT, Voltage Rating (DC)=50V, Width=0.5mm, Working Voltage=50V
R7: "RES SMD 1K OHM 1% 1/16W 0402", Case Code (Imperial)=0402, Case Code (Metric)=1005, Manufacturer=Yageo, Max Operating Temperature=155°C, Min Operating Temperature=-55°C, Power Rating=62.5mW, Resistance=1kR, Resistor Type="Thick Film", Supplier Part Number 1=311-1.00KLRDKR-ND, Temperature Coefficient=100ppm/°C, Tolerance=1%, Voltage Rating=50V, Case/Package=0402, Category=Resistors, Checked=?, ComponentLink2Description="Online datasheet", ComponentLink2URL=https://datasheet.ciiva.com/12666/pyu-rc0402-51-rohs-l-6-r-12666741.pdf, Created=D.G, Depth=0.5mm, Height=0.32mm, Lead Free="Lead Free", Length=1mm, Manufacturer Part Number=RC0402FR-071KL, Military Standard=Not, Number of Pins=2, Packaging="Tape and Reel", Pricing 1="1=0.10000, 10=0.01400, 100=0.00580, 1000=0.00262, 2500=0.00228, 5000=0.00188 (USD)", Pricing 2="1=0.10000, 10=0.01200, 100=0.00400, 1000=0.00400, 2500=0.00400, 10000=0.00300 (USD)", Pricing 3="1=0.08130, 25=0.01210, 100=0.01120, 250=0.01030, 500=0.00900 (GBP)", REACH SVHC=Unknown, RoHS=Yes, Stock 1=37591306, Stock 2=11912978, Stock 3=29900, Supplier 1=Digi-Key, Supplier 2=Mouser, Supplier 3=Farnell, Supplier Part Number 2=603-RC0402FR-071KL, Supplier Part Number 3=2132441, Termination=SMD/SMT, Voltage Rating (DC)=50V, Width=0.5mm
U1: library part NCP114ASN330T1G, "ON SEMICONDUCTOR - NCP114ASN330T1G - LDO Voltage Regulator, Fixed, 1.7 V to 5.5 V in, 3.3 V/300 mA out, 150 mV drop, TSOP-5", Case/Package=SOT-23-5, Dropout Voltage=225mV, Manufacturer="ON Semiconductor", Max Input Voltage=5.5V, Max Operating Temperature=85°C, Min Operating Temperature=-40°C, Min Output Voltage=3.3V, Output Current=300mA, Power Supply Rejection Ratio (PSRR)=75dB, Quiescent Current=95uA, Supplier Part Number 1=NCP114ASN330T1GOSCT-ND, Category="Voltage Regulators - Linear", Checked=?, ComponentLink3Description="On Semi datasheet online", ComponentLink3URL=http://www.onsemi.com/pub/Collateral/NCP114-D.PDF, Created=DG, Lead Free="Lead Free", Manufacturer Part Number=NCP114ASN330T1G, Mount="Surface Mount", Number of Regulators=1, Output Configuration=Positive, Output Type=Fixed, Packaging="Cut Tape", Pricing 1="1=0.33000, 10=0.24900, 25=0.21760, 100=0.12440, 250=0.11664, 500=0.09330, 1000=0.07153 (USD)", RoHS=No, Stock 1=32529, Supplier 1=Digi-Key, Supplier 2=RSComponents, Supplier 3=Mouser, Supplier Part Number 2=1263178, Supplier Part Number 3=863-NCP114ASN330T1G
U2: "MCU 32-bit ARM Cortex M0+ RISC 32KB Flash 2.5V/3.3V 8-Pin SO N Tube", Manufacturer=STMicroelectronics, Supplier Part Number 1=497-19552-ND, Category=Microcontrollers, Checked By=?, ComponentLink1Description="Online datasheet", ComponentLink1URL=https://www.st.com/resource/en/datasheet/stm32g031c6.pdf, Created By="D. Gakure", Manufacturer Part Number=STM32G031J6M6, Pricing 1="1=1.80000, 10=1.61600, 25=1.52480, 100=1.29920, 250=1.21992, 500=1.06744, 1000=0.88952 (USD)", Pricing 2="1=1.91000, 25=1.70000, 75=1.63000, 150=1.59000, 400=1.53000 (USD)", Pricing 3="1=1.50000, 10=1.28000, 50=1.28000, 100=1.09000, 1000=0.73700, 10000=0.71100 (USD)", RoHS=Yes, Supplier 1=Digi-Key, Supplier 2="Future Electronics", Supplier 3=Mouser, Supplier Part Number 2=2116576, Supplier Part Number 3=511-STM32G031J6M6

## Via types
v1: diameter 0.6, hole 0.3, Top Layer to Bottom Layer, tented both sides, 13 vias

## Nets (pads, with @x,y where several pads share a name; then routed paths per layer and width w, separated by ;. In a path a pad name is that pad's centre, name@x,y a point inside that pad or via, vN(x,y) a via of type N, cw(c..) or ccw(c..) an arc to the next point about the centre after c; other vN are vias at no path point)
3V3: C3.2 C5.2 D1.2 J2.1 Q1.1 R2.1 R4.1 U1.5 U2.2 | length 18.6
  Top Layer w0.5: J2.1@-5.251,14.599 -4.945,14.905 -4.945,15.141 -3.786,16.3 R4.1 -3.65,17.514 -3.625,17.539 -3.811,17.725 U1.5 -5,17.625 U1.5@-5,17.475 ; D1.2 J2.1 ; C3.2@-3.34,17.735 -2.58,18.495 -2.58,18.845 -0.55,20.875 -0.5,20.875 Q1.1@-0.35,21.025 ; Q1.1 Q1.1@-0.35,21.025 ; U2.2 0.635,18.1 0.5,18.235 C5.2 0.5,19.257 0.918,19.675 ; R2.1 1.5,19.675 0.918,19.675 ; Q1.1@-0.35,21.025 0.918,19.757 0.918,19.675
GND: C1.1 C2.1 C3.1 C5.1 D1.1 D2.2 D3.2 D7.2 J1.2 J2.3 J4.5 J4.6 J4.7 J4.8 J4.9 J4.10 J4.11 J6.3 MH1.1 MH2.1 R7.1 U1.2 U2.3 | length 96.3
  Top Layer w0.5: C1.1 -3.15,8.428 -3.131,8.41 -3.131,8.185 -3.081,8.135 -2.193,8.135 -0.102,6.044 ; J1.2@0,5.3 -0.102,5.402 -0.102,6.044 ; R7.1 R7.1@1.551,8.857 ; D2.2@3.248,7.39 1.782,8.857 R7.1@1.551,8.857 ; D2.2 3.195,7.375 2.599,6.779 0.634,6.779 -0.102,6.044 ; J4.6@4.941,14.6 J4.6 ; J4.8 6.407,12.177 6.407,10.934 6.114,10.641 3.336,10.641 R7.1@1.551,8.857
  Top Layer w0.7: v1(-7.586,9.911) -7.586,10.489 D1.1@-7.35,10.725 ; MH2.1 MH2.1@-7.305,28.35 ; D1.1 -7.15,13.45 -6.598,14.002 -6.598,14.789 -6.76,14.951 -6.76,15.027 -8.368,16.634 C2.1 -6.436,19.134 -6.05,19.52 -6.05,19.553 ; U1.2 -6.05,19.553 ; v1(-2.611,20.895) -2.611,20.759 -3.6,19.77 C3.1 -5.232,18.735 -6.05,19.553 ; C5.1 -0.635,19.097 U2.3 -0.631,17.696 -0.631,16.251 v1(-0.367,15.988) ; J4.5@5.13,18.55 J4.7 ; J4.8 J4.10 J4.11 J4.9
  Bottom Layer w1: v1(-7.586,9.911) v1(-3.139,9.911) ; MH2.1 -4.202,28.35 -2.657,26.805 -2.657,25.092 -2.54,24.975 -2.611,24.904 -2.611,20.759 -0.615,18.763 -0.615,16.236 v1(-0.367,15.988) -0.08,15.7 2.175,15.7 3.275,14.6 J4.6 5.265,14.6 6.315,13.55 7.78,13.55 J4.8 ; J4.7 6.83,19.6 J4.9 6.05,22.38 6.05,26.764 7.5,28.214 MH1.1
  other v1: 0,2.425
JD_DATA: D3.1 FB1.1 J1.1 MH3.1 | length 14.2
  Top Layer w0.3: MH3.1 -7.5,6.349 -5.847,8.002 -4.977,8.002 ; FB1.1@-4.2,8.78 -4.977,8.002 ; J1.1@-1.27,5.3 -1.425,5.455 -1.425,5.961 -2.831,7.367 -2.831,7.385 -2.881,7.435 D3.1 -4.411,7.435 -4.977,8.002
  Bottom Layer w0.3: J1.1@-1.27,5.3 -0.445,4.475 0.495,4.475 1.27,3.7 J1.1@1.27,2.675
JD_DATA_MCU/SWCLK: D1.3 J2.4 R1.1 U2.8 | length 18
  Top Layer w0.3: R1.1 -6.5,9.65 -6.4,9.75 -6.4,9.775 -6.2,9.975 D1.3@-6.2,12.625 ; U2.8 1.928,12.423 1.928,13.786 v1(1.952,13.81)
  Bottom Layer w0.3: J2.4@-6.335,16.032 -5.733,15.43 -4.419,15.43 -2.711,13.722 ; v1(-6.2,11.966) -4.484,11.966 -2.728,13.722 -2.711,13.722 ; v1(1.952,13.81) 1.895,13.752 1.682,13.752 1.652,13.722 -2.711,13.722
JD_PWR: D2.1 D5.2 J1.3 MH4.1 | length 19.7
  Top Layer w0.5: J1.3@1.27,5.3 1.387,5.417 2.267,5.417 D2.1@3.475,6.625 ; D2.1 5.891,6.675 ; D5.2 3.575,8.991 5.891,6.675 ; MH4.1 6.824,5.85 5.999,6.675 5.891,6.675
  Bottom Layer w0.5: J1.3@-1.27,2.425 -1.27,3.7 -2.52,4.95 -2.52,6.207 -2.227,6.5 0.975,6.5 1.275,6.2 1.275,5.305 J1.3@1.27,5.3
JD_STATUS: D4.2 U2.6 | length 3.1
  Top Layer w0.3: U2.6 -0.635,10.16 D4.2
NetC1_2: C1.2 FB1.2 R1.2 | length 3.2
  Top Layer w0.3: -6.475,8.912 -5.525,8.912 -5.45,8.987 -5.45,9.2 -4.25,10.4 -4.25,10.541 C1.2
NetD4_1: D4.1 R7.2 | length 1.5
  Top Layer w0.3: D4.1 0.009,7.866 1.517,7.866 R7.2
NetJ5_1: J5.1 R4.2 | length 9.4
  Top Layer w0.3: J5.1 -6.964,22.13 -6.329,22.13 v1(-6.324,22.135) ; R4.2 -3.625,15.3 -2.71,16.215 v1(-2.71,17.1)
  Bottom Layer w0.3: v1(-6.324,22.135) -6.324,20.757 -2.71,17.142 v1(-2.71,17.1)
nRESET/RGB_CLK: J2.5 J3.1 U2.4 | length 20.7
  Top Layer w0.3: U2.4 -1.888,17.683 -1.888,16.262 v1(-1.872,16.245)
  Bottom Layer w0.3: J2.5 -7.815,14.625 -7.815,16.964 -7.526,17.252 -4.182,17.252 -3.233,16.303 -1.929,16.303 v1(-1.872,16.245) -1.872,18.077 -5.073,21.278 -5.073,22.423 J3.1
RGB_CONFIG: J5.2 U2.5 | length 17.5
  Top Layer w0.3: v1(-8.198,21.677) -8.198,21.752 J5.2@-7.824,22.126 ; v1(-3.6,11.35) -2.555,11.35 -1.905,12 U2.5
  Bottom Layer w0.3: v1(-8.198,21.677) -8.66,21.215 -8.67,21.128 -8.67,17.205 ccw(c-8.375,17.149) -8.675,17.151 -8.675,13.2 -6.825,11.35 v1(-3.6,11.35)
RGB_DATA_3V3: Q1.2 R2.2 U2.1 | length 4
  Top Layer w0.3: Q1.2 1.55,21.025 1.8,20.775 1.85,20.775 2.432,20.193 2.432,19.768 R2.2 2.5,18.695 1.905,18.1 U2.1
RGB_DATA_5V: J6.2 Q1.3 R3.2 | length 5.5
  Top Layer w0.5: R3.2 -1.926,21.6 -0.431,23.095 Q1.3@0.6,23.095 ; J6.2@0,24.975 0,24.572 0.583,23.989 Q1.3@0.583,23.142
RGB_PWR: C2.2 D5.1 D6.1 J6.1 R3.1 U1.1 U1.3 | length 39.3
  Top Layer w0.7: C2.2 -7.009,20.134 U1.3 -7,20.697 -6.597,21.1 -5.503,21.1 -5.225,20.822 ; -5.352,21.09 -5.493,21.09 -4.891,21.693 -3.81,21.693 -2.903,22.6 ; U1.1@-5.225,20.605 -5.1,20.48 U1.1 ; R3.1 -2.71,22.6 -4.072,23.962 -4.072,27.982 -3.079,28.975 1.75,28.975 2.54,28.185 2.54,26.245 2.54,24.975 3.997,23.518 3.997,22.628 4.075,22.55 3.775,22.25 3.775,22.125 3.575,21.925 3.575,17.95 2.889,17.264 2.889,13.576 3.275,13.19 3.275,12.266 D5.1
SWDIO: J2.2 U2.7 | length 8.8
  Top Layer w0.3: U2.7 v1(0.635,14.581)
  Bottom Layer w0.3: J2.2 -5.224,16.25 -4.394,16.25 -2.725,14.581 v1(0.635,14.581)
VUSB: D6.2 D7.1 J4.1 | length 12.2
  Top Layer w0.6: J4.1@5.155,15.825 5.97,15.825 ; D7.1 5.707,13.21
  Top Layer w0.8: 5.707,13.21 6.33,13.833 6.33,21.83 6.775,22.275 6.775,22.4 6.925,22.55 D6.2
pads on no net: J1. J4.2 J4.3 J4.4 U1.4

## Silkscreen, mask and mechanical layers (free items; w line width, h text height)
Top Overlay:
  region: 187 vertices and 1 holes, not listed, extent 4.941,25.61 7.87,27.952
  text "GND" at -2.905,30.125 h0.6 r270
  text "DOUT" at -0.405,30.125 h0.6 r270
  text "5V" at 2.02,30.125 h0.6 r270
  text "CLK" at -5.632,24.005 h0.6
  text "DOTSTAR" at -6.575,21.725 h0.6
Bottom Overlay:
  drawing of 6 lines, arcs and shapes, not listed
  text "GND" at -2.125,30.125 h0.6 r90
  text "DOUT" at 0.4,30.125 h0.6 r90
  text "5V" at 2.825,30.125 h0.6 r90
  text "CLK" at -4,24 h0.6
  text "JacdacRgbLedGeneric" at 6.275,12.097 h0.9
  text "'.ProjectCodenameID'-'.ProjectRevision'" at 3.762,11.031 h0.9
Dimension:
  drawing of 224 lines, arcs and shapes, not listed
Board Outline:
  drawing of 224 lines, arcs and shapes, not listed
Top Assy:
  drawing of 224 lines, arcs and shapes, not listed
Bottom Assy:
  drawing of 224 lines, arcs and shapes, not listed

## Dimensions
-9.277,16.566 to 9.279,16.744 on Dimension
-7.5,28.35 to 7.5,28.35 on Dimension
-7.5,28.35 to -7.5,5.85 on Dimension
-2.47,0 to -7.373,30.346 on Dimension

## Text inside footprints (layer, text, board x,y; h text height)
J1: Alignment "board outline  / for 'outie'" at -5.14,4.986 h1.2 r180; Alignment "board outline  / for 'innie'" at -4.53,7.831 h1.2 r180; Mechanical 9 "Jacdac / cable connector  / body" at 4.821,-4.158 h1.7 r180
J4: Alignment "PCB edge" at 8.93,15.1 h0.51 r90
MH4: Alignment "5mm dia keepout  / for traces and  / components to  / allow space for  / bushes/standoffs/ / nuts/screw heads" at 13.075,-6.625 h0.5 r90; Alignment "board outline can  / be on 2.0mm   / radius if necessary" at 6.35,-6.85 h0.5 r90